# EAGLE board opto_endstop (EAGLE 5.02)
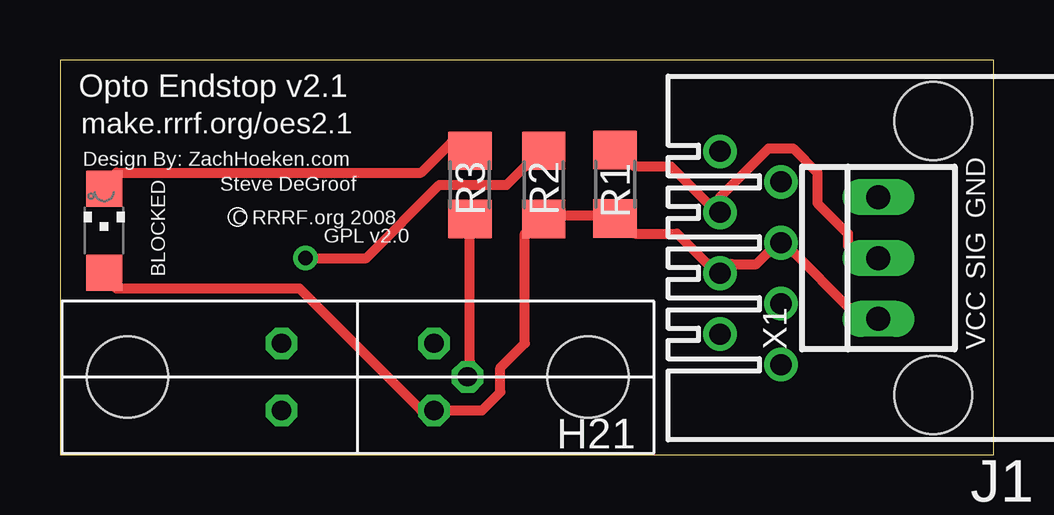
[diagram p0: board, top side]
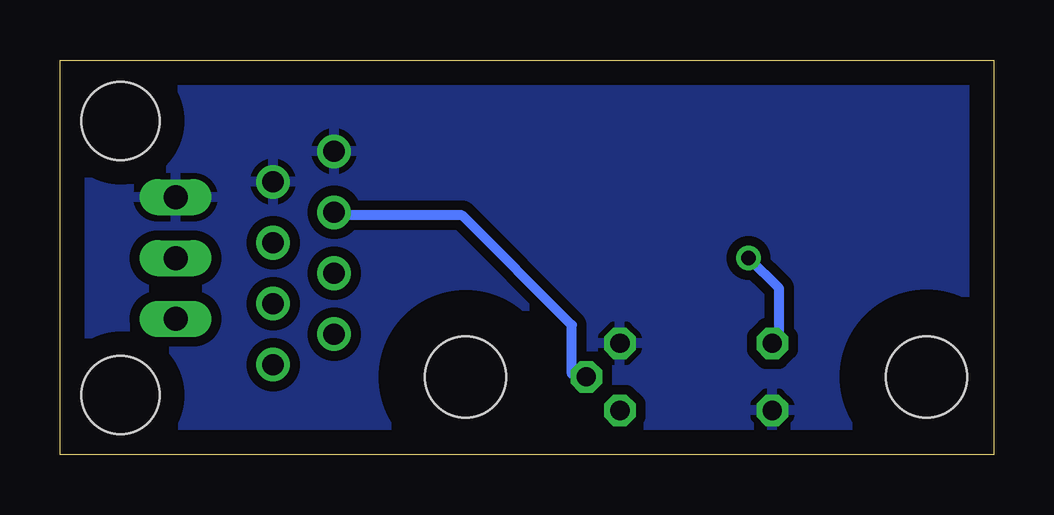
[diagram p1: board, bottom side, seen from below]

Size 38.91 x 16.45 mm. Coordinates in mm from the lower left corner, seen from the top.
Outline: 0,0 38.91,0 38.91,16.45 0,16.45 0,0
Copper layers (1*16): Top 0.035mm / dielectric 1.5mm / Bottom 0.035mm
Design rules "default": minimum track width 10mil, minimum drill 24mil, track to track 8mil, track to pad 8mil, pad to pad 8mil, via to via 8mil, smd to smd 8mil, copper to edge 40mil, drill to drill 8mil, minimum pad ring 10mil, minimum via ring 8mil, stop-mask expansion 4mil, vias tented up to drill 0mil, thermal gap 10mil
Net classes: 0 default: width 0.406 mm, clearance 0.406 mm

## Footprints (pad centres in the part's own frame; a part is rotated, then mirrored left to right if it is on the bottom)
520426-4 = drill 0.889 round: 1 -4.445,6.35; 2 -3.175,8.89; 3 -1.905,6.35; 4 -0.635,8.89; 5 0.635,6.35; 6 1.905,8.89; 7 3.175,6.35; 8 4.445,8.89 | hole 3.251: -5.715,0; 5.715,0
CHIPLED_1206 = smd 1.5 x 1.5: A 0,-1.75; C 0,1.75
R1206 = smd 1.6 x 1.803: 1 -1.422,0; 2 1.422,0
H21 = drill 0.8 octagon: 1 9.169,4.572; 2 9.169,1.778; 3 15.519,1.778; 4 16.916,3.175; 5 15.519,4.572 | hole 3.378: 2.743,3.175; 21.946,3.175
22-23-2031 = drill 1 long: 1 -2.54,0; 2 0,0; 3 2.54,0

## Placement (x,y rotation side)
J1  [520426-4]  36.39,8.2 90 top
LED1  [CHIPLED_1206]  1.84,9.34 0 top
R1  10K  [R1206]  23.13,11.27 270 top
R2  220  [R1206]  20.15,11.25 270 top
R3  1K  [R1206]  17.08,11.25 270 top
U$1  H21LOB  [H21]  0.06,0.07 0 top
X1  22-23-2031  [22-23-2031]  34.1,8.2 90 top

## Library data of the parts
J1 = con-amp
LED1 = led
R1-R3 = resistor
U$1 = reprap
X1 = con-molex

## Nets
GND: J1.7 J1.8 U$1.2 U$1.5 X1.3
N$1: LED1.C R3.1
N$2: J1.6 R1.1 R3.2 U$1.4 X1.2
N$4: R2.1 U$1.1
VCC: J1.4 J1.5 LED1.A R1.2 R2.2 U$1.3 X1.1

## Tracks (layer width: path | path; a pad name or v marks a point on that pad's centre or on a via)
GND
  pour Bottom: 0.06,16.33 38.8,16.33 38.8,-0.18 0.06,-0.18
N$1
  Top 0.406: LED1.C 2.35,11.76 15.05,11.76 16.32,13.03 R3.1
N$2
  Top 0.406: R3.2 17.08,3.88 U$1.4 | R1.1 23.94,12.01 25.46,12.01 26.99,10.49 J1.6 27.5,10.74 29.53,12.77 30.54,12.77 31.56,11.76 31.56,10.49 32.83,9.22 32.83,8.71 X1.2
  Bottom 0.406: U$1.4 17.59,3.37 17.59,5.41 22.16,9.98 26.99,9.98 J1.6
N$4  (via drill 0.61)
  Top 0.406: v10.22,8.2 12.76,8.2 15.81,11.25 18.61,11.25 19.37,12.01 R2.1
  Bottom 0.406: v10.22,8.2 8.95,6.93 8.95,5.15 U$1.1
VCC
  Top 0.406: X1.1 32.83,6.17 30.54,8.45 J1.5 29.53,8.45 29.02,7.95 28,7.95 J1.4 26.99,7.95 25.72,9.22 23.94,9.22 R1.2 22.42,9.98 20.89,9.98 R2.2 19.37,9.22 19.37,4.64 18.35,3.63 18.35,2.61 17.59,1.85 U$1.3 15.05,1.85 9.97,6.93 2.35,6.93 LED1.A

## Text on the board
tPlace: Opto Endstop v2.1 | make.rrrf.org/oes2.1 | Design By: ZachHoeken.com | Steve DeGroof | C RRRF.org 2008 | GND | GPL v2.0 | BLOCKED | SIG | VCC